# Altium PCB Main2.PcbDoc
Units mm, origin at the board's own origin, x right, y up, seen from the top; angles counter-clockwise.
Board outline 145.75 x 96.95 mm, 2 copper layers (Top Layer, Bottom Layer); 13 components, 21 nets, 214 pads, 0 vias.
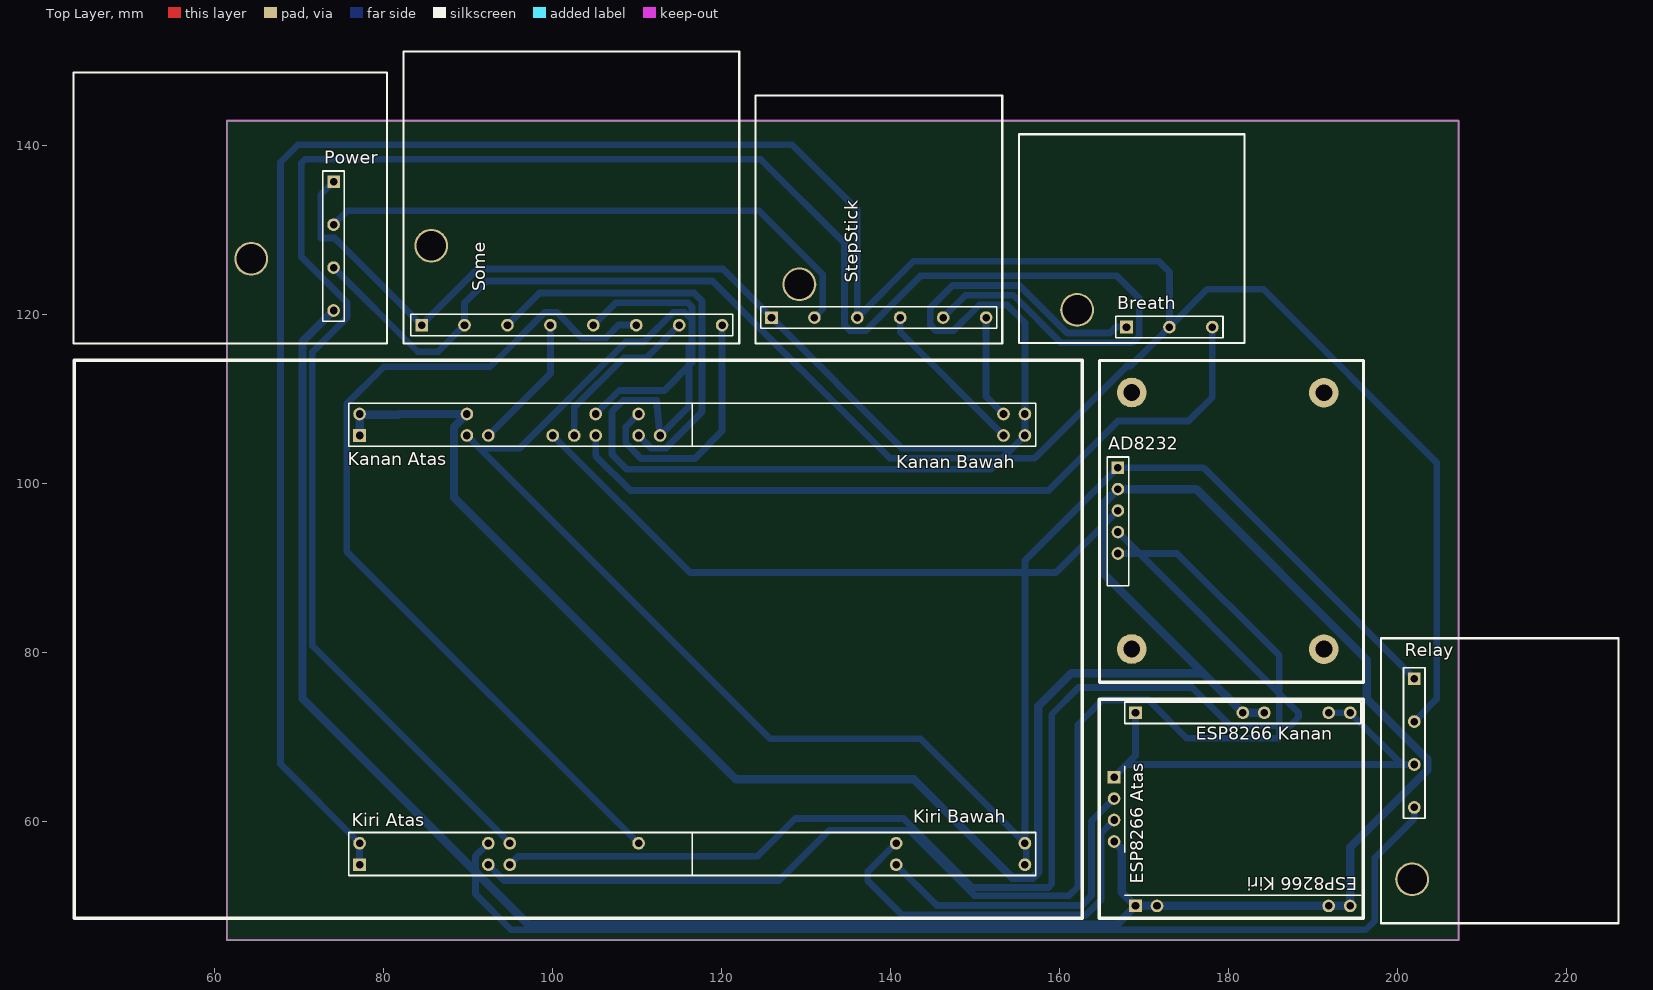
[diagram p0: Top Layer view]
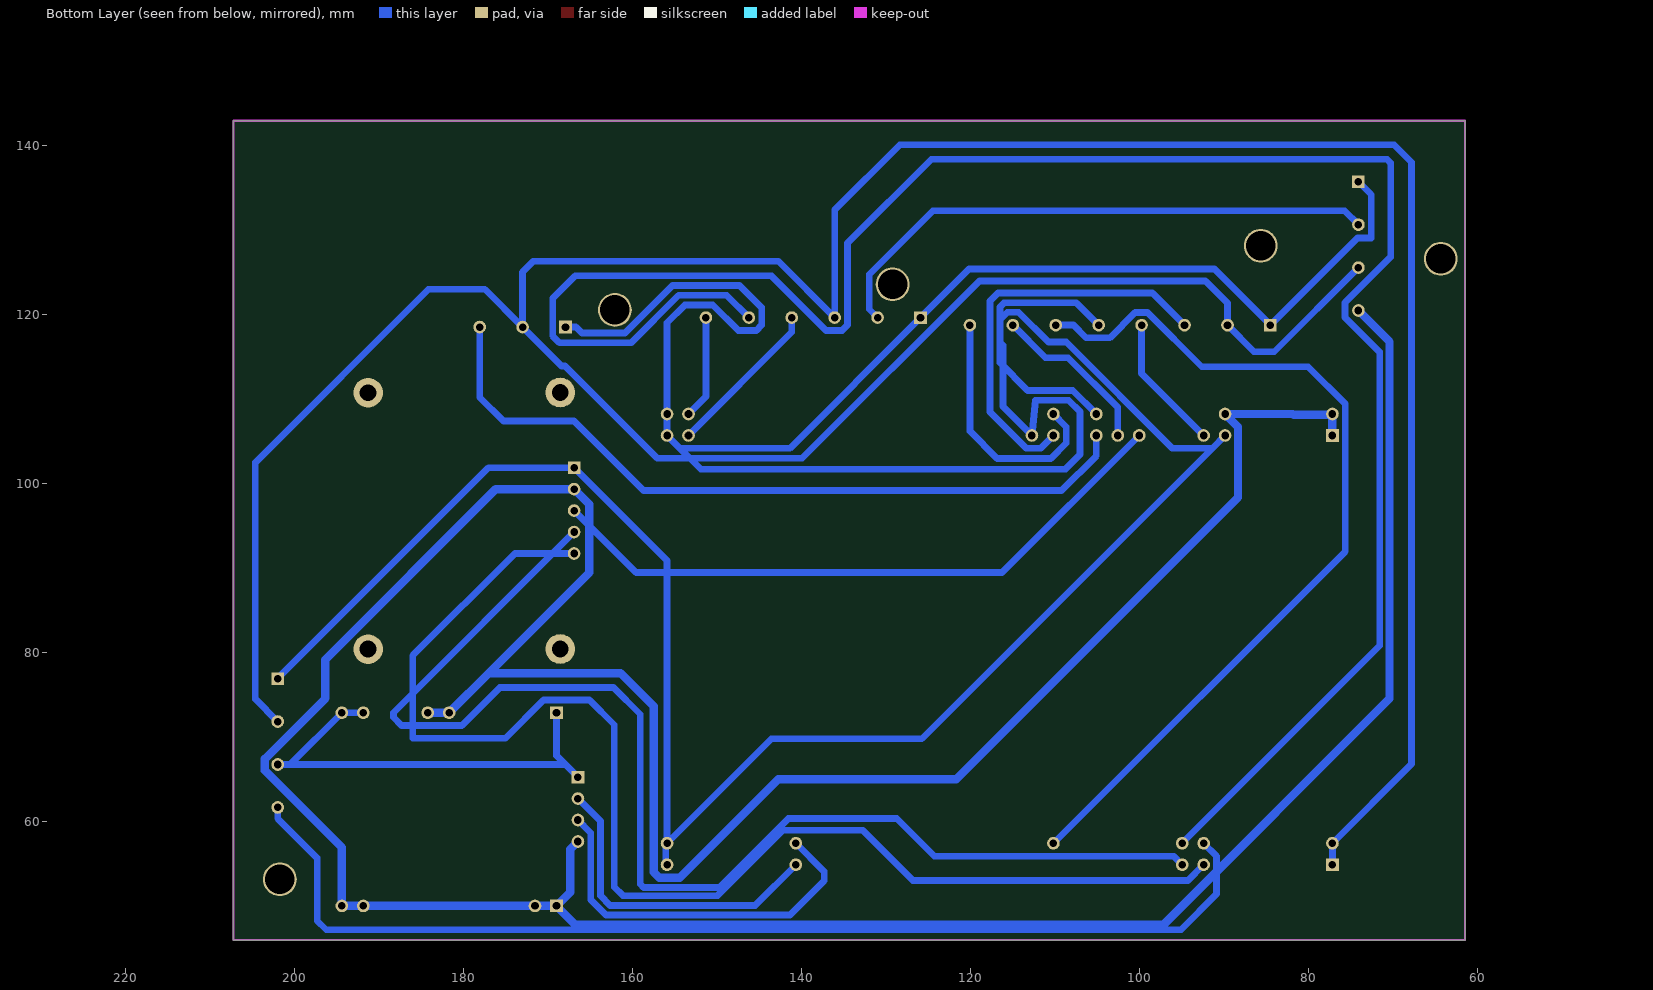
[diagram p1: Bottom Layer view, seen from below]

## Layer stack, top to bottom
Top Solder: solder mask 0.0102, Solder Resist, Dk 3.5
Top Layer: signal copper 0.0356
Dielectric 1: dielectric 0.32, FR-4, Dk 4.8
Bottom Layer: signal copper 0.0356
Bottom Solder: solder mask 0.0102, Solder Resist, Dk 3.5

## Board outline
61.468,45.974 61.468,142.926 207.213,142.926 207.213,45.974

## Design rules (kind name [scope] priority, off if disabled: settings)
Clearance [All] p1: gap=0.35
PolygonConnect [All] p1: connectstyle=Relief reliefconductorwidth=0.254 reliefentries=4 polygonreliefangle="90 Angle" airgapwidth=0.254
RoutingVias [All] p1: holewidth=0.711 width=1.27 viastyle="Through Hole" minholewidth=0.711 minwidth=1.27 maxholewidth=0.711 maxwidth=1.27
SolderMaskExpansion [All] p1: expansion=0.102
Width Width_1 [All] p1: maxlimit=0.8 minlimit=0.8 preferedwidth=0.8
30 further rules are at their usual default settings.

## Components (designator, comment, footprint, x,y, rotation, side; value= is the part's Value field where it differs from the comment)
AD8232 "" HDR1X6 166.903,101.879 r270 top
Breath "Header 5" HDR1X5 167.919,118.516 r0 top
"ESP8266 Atas" "" HDR1X4 166.451,65.258 r270 top
"ESP8266 Kanan" "" HDR1X11#1 168.991,72.878 r0 top
"ESP8266 Kiri" "" HDR1X11#2 168.991,50.018 r0 top
"Kanan Atas" "" HDR2X16#1 77.165,105.689 r0 top
"Kanan Bawah" "" HDR2X16#2 117.805,105.689 r0 top
"Kiri Atas" "" HDR2X16#3 77.165,54.889 r0 top
"Kiri Bawah" "" HDR2X16#4 117.805,54.889 r0 top
Power "Header 7" HDR1X7 74.092,135.712 r270 top
Relay "Header 7" HDR1X7 201.981,76.911 r270 top
Some "Header 15" HDR1X15 84.506,118.745 r0 top
StepStick "Header 11" HDR1X11#3 125.908,119.634 r0 top

## Footprints (in the part's own frame and the unit in brackets; to place one, negate y for a bottom-side part, rotate by r counter-clockwise, add the part's x,y. Pads: shape width x height; smd on the part's side, far side on the other; paste and mask are expansions set on the pad)
HDR1X4 [mm] "Connector; Header; 4 Position"
  rect 1.5x1.5 hole 0.9: 1(0,0)
  round 1.5 hole 0.9: 2(2.54,0) 3(5.08,0) 4(7.62,0)
  silkscreen extent -1.27,1.27 8.89,1.27
HDR1X5 [mm] "Connector; Header; 5 Position"
  rect 1.5x1.5 hole 0.9: 1(0,0)
  round 0 all layers, no hole: 2(2.54,0) 4(7.62,0)
  round 1.5 hole 0.9: 3(5.08,0) 5(10.16,0)
  silkscreen extent -1.27,-1.27 11.43,1.27
HDR1X6 [mm] "Connector; Header; 6 Position"
  rect 1.5x1.5 hole 0.9: 1(0,0)
  round 1.5 hole 0.9: 2(2.54,0) 3(5.08,0) 4(7.62,0) 5(10.16,0)
  round 0 all layers, no hole: 6(12.7,0)
  silkscreen extent -1.27,-1.27 13.97,1.27
HDR1X7 [mm] "Connector; Header; 7 Position"
  rect 1.5x1.5 hole 0.9: 1(0,0)
  round 0 all layers, no hole: 2(2.54,0) 4(7.62,0) 6(12.7,0)
  round 1.5 hole 0.9: 3(5.08,0) 5(10.16,0) 7(15.24,0)
  silkscreen extent -1.27,-1.27 16.51,1.27
HDR1X11#1 [mm] "Connector; Header; 11 Position"
  rect 1.5x1.5 hole 0.9: 1(0,0)
  round 0 all layers, no hole: 2(2.54,0) 3(5.08,0) 4(7.62,0) 5(10.16,0) 8(17.78,0) 9(20.32,0)
  round 1.5 hole 0.9: 6(12.7,0) 7(15.24,0) 10(22.86,0) 11(25.4,0)
  silkscreen extent -1.27,-1.27 26.67,1.27
HDR1X11#2 [mm] "Connector; Header; 11 Position"
  rect 1.5x1.5 hole 0.9: 1(0,0)
  round 1.5 hole 0.9: 2(2.54,0) 10(22.86,0) 11(25.4,0)
  round 0 all layers, no hole: 3(5.08,0) 4(7.62,0) 5(10.16,0) 6(12.7,0) 7(15.24,0) 8(17.78,0) 9(20.32,0)
  silkscreen extent -1.27,1.27 26.67,1.27
HDR1X11#3 [mm] "Connector; Header; 11 Position"
  rect 1.5x1.5 hole 0.9: 1(0,0)
  round 0 all layers, no hole: 2(2.54,0) 4(7.62,0) 6(12.7,0) 8(17.78,0) 10(22.86,0)
  round 1.5 hole 0.9: 3(5.08,0) 5(10.16,0) 7(15.24,0) 9(20.32,0) 11(25.4,0)
  silkscreen extent -1.27,-1.27 26.67,1.27
HDR1X15 [mm] "Connector; Header; 15 Position"
  rect 1.5x1.5 hole 0.9: 1(0,0)
  round 0 all layers, no hole: 2(2.54,0) 4(7.62,0) 6(12.7,0) 8(17.78,0) 10(22.86,0) 12(27.94,0) 14(33.02,0)
  round 1.5 hole 0.9: 3(5.08,0) 5(10.16,0) 7(15.24,0) 9(20.32,0) 11(25.4,0) 13(30.48,0) 15(35.56,0)
  silkscreen extent -1.27,-1.27 36.83,1.27
HDR2X16#1 [mm] "Connector; Header; 16x2 Position"
  rect 1.5x1.5 hole 0.9: 1(0,0)
  round 1.5 hole 0.9: 2(0,2.54) 11(12.7,0) 12(12.7,2.54) 13(15.24,0) 19(22.86,0) 21(25.4,0) 23(27.94,0) 24(27.94,2.54) 27(33.02,0) 28(33.02,2.54) 29(35.56,0)
  round 0 all layers, no hole: 3(2.54,0) 4(2.54,2.54) 5(5.08,0) 6(5.08,2.54) 7(7.62,0) 8(7.62,2.54) 9(10.16,0) 10(10.16,2.54) 14(15.24,2.54) 15(17.78,0) 16(17.78,2.54) 17(20.32,0) 18(20.32,2.54) 20(22.86,2.54) 22(25.4,2.54) 25(30.48,0) 26(30.48,2.54) 30(35.56,2.54) 31(38.1,0) 32(38.1,2.54)
  silkscreen extent -1.27,-1.27 39.37,3.81
HDR2X16#2 [mm] "Connector; Header; 16x2 Position"
  rect 0x0 all layers, no hole: 1(0,0)
  round 0 all layers, no hole: 2(0,2.54) 3(2.54,0) 4(2.54,2.54) 5(5.08,0) 6(5.08,2.54) 7(7.62,0) 8(7.62,2.54) 9(10.16,0) 10(10.16,2.54) 11(12.7,0) 12(12.7,2.54) 13(15.24,0) 14(15.24,2.54) 15(17.78,0) 16(17.78,2.54) 17(20.32,0) 18(20.32,2.54) 19(22.86,0) 20(22.86,2.54) 21(25.4,0) 22(25.4,2.54) 23(27.94,0) 24(27.94,2.54) 25(30.48,0) 26(30.48,2.54) 27(33.02,0) 28(33.02,2.54)
  round 1.5 hole 0.9: 29(35.56,0) 30(35.56,2.54) 31(38.1,0) 32(38.1,2.54)
  silkscreen extent -1.27,-1.27 39.37,3.81
HDR2X16#3 [mm] "Connector; Header; 16x2 Position"
  rect 1.5x1.5 hole 0.9: 1(0,0)
  round 1.5 hole 0.9: 2(0,2.54) 13(15.24,0) 14(15.24,2.54) 15(17.78,0) 16(17.78,2.54) 28(33.02,2.54)
  round 0 all layers, no hole: 3(2.54,0) 4(2.54,2.54) 5(5.08,0) 6(5.08,2.54) 7(7.62,0) 8(7.62,2.54) 9(10.16,0) 10(10.16,2.54) 11(12.7,0) 12(12.7,2.54) 17(20.32,0) 18(20.32,2.54) 19(22.86,0) 20(22.86,2.54) 21(25.4,0) 22(25.4,2.54) 23(27.94,0) 24(27.94,2.54) 25(30.48,0) 26(30.48,2.54) 27(33.02,0) 29(35.56,0) 30(35.56,2.54) 31(38.1,0) 32(38.1,2.54)
  silkscreen extent -1.27,-1.27 39.37,3.81
HDR2X16#4 [mm] "Connector; Header; 16x2 Position"
  rect 0x0 all layers, no hole: 1(0,0)
  round 0 all layers, no hole: 2(0,2.54) 3(2.54,0) 4(2.54,2.54) 5(5.08,0) 6(5.08,2.54) 7(7.62,0) 8(7.62,2.54) 9(10.16,0) 10(10.16,2.54) 11(12.7,0) 12(12.7,2.54) 13(15.24,0) 14(15.24,2.54) 15(17.78,0) 16(17.78,2.54) 17(20.32,0) 18(20.32,2.54) 21(25.4,0) 22(25.4,2.54) 23(27.94,0) 24(27.94,2.54) 25(30.48,0) 26(30.48,2.54) 27(33.02,0) 28(33.02,2.54) 29(35.56,0) 30(35.56,2.54)
  round 1.5 hole 0.9: 19(22.86,0) 20(22.86,2.54) 31(38.1,0) 32(38.1,2.54)
  silkscreen extent -1.27,-1.27 39.37,3.81

## Part data
AD8232: library part "Header 6", "Header, 6-Pin"
Breath: "Header, 5-Pin"
"ESP8266 Atas": library part "Header 4", "Header, 4-Pin"
"ESP8266 Kanan" "ESP8266 Kiri": library part "Header 11", "Header, 11-Pin"
"Kanan Atas" "Kanan Bawah" "Kiri Atas" "Kiri Bawah": library part "Header 16X2", "Header, 16-Pin, Dual row"
Power Relay: "Header, 7-Pin"
Some: "Header, 15-Pin"
StepStick: "Header, 11-Pin"

## Free pads (board coordinates)
  round 3.5 hole 2: 6(191.278,80.395) 7(168.545,80.42) 8(168.545,110.773) 9(191.278,110.748)
  round 4 hole 3.5: 8(64.338,126.594) 8(162.077,120.548) 10(85.649,128.143) 10(129.21,123.571) 10(201.727,53.162)

## Nets (pads, with @x,y where several pads share a name; then routed paths per layer and width w, separated by ;. In a path a pad name is that pad's centre, name@x,y a point inside that pad or via, vN(x,y) a via of type N, cw(c..) or ccw(c..) an arc to the next point about the centre after c; other vN are vias at no path point)
+3.3: "ESP8266 Atas.4" "ESP8266 Kanan.6" "ESP8266 Kanan.7" "ESP8266 Kiri.1" "ESP8266 Kiri.2" "ESP8266 Kiri.10" "ESP8266 Kiri.11" "Kanan Atas.1" "Kanan Atas.2" "Kanan Atas.12" AD8232.2 Power.7 | length 457.1
  Bottom Layer w1: Power.7 70.409,116.789 70.409,74.549 97.18,47.777 166.751,47.777 168.991,50.018 ; 77.165,105.689 77.165,108.229 77.268,108.127 81.751,108.127 81.853,108.229 89.865,108.229 88.341,106.705 88.341,98.349 121.666,65.024 142.723,65.024 154.381,53.365 156.845,53.365 157.505,54.026 157.505,73.66 161.417,77.572 176.997,77.572 ; 166.451,57.638 167.386,56.702 167.386,51.622 168.991,50.018 ; 184.231,72.878 181.691,72.878 176.997,77.572 ; 168.991,50.018 171.531,50.018 174.777,50.018 174.798,50.038 190.348,50.038 190.368,50.018 191.851,50.018 194.391,50.018 194.391,56.926 203.505,66.04 203.505,67.412 196.342,74.574 196.342,79.172 176.174,99.339 AD8232.2 165.1,97.536 165.1,89.468 176.997,77.572
+5: "Kiri Atas.1" "Kiri Atas.2" Breath.3 Power.5 Relay.3 Some.3 StepStick.5 | length 415.7
  Bottom Layer w0.8: Power.5 84.049,115.595 86.436,115.595 Some.3 89.586,121.361 92.202,123.977 118.923,123.977 139.903,102.997 157.074,102.997 167.996,113.919 168.402,113.919 Breath.3 ; 77.165,54.889 77.165,57.429 67.793,66.802 67.793,138.024 69.85,140.081 128.372,140.081 136.068,132.385 StepStick.5 142.748,126.314 171.697,126.314 172.999,125.012 Breath.3 ; Relay.3 204.631,74.481 204.631,102.5 184.143,122.987 177.47,122.987 Breath.3
+7.4: Power.3 StepStick.3 | length 67.2
  Bottom Layer w0.8: Power.3 75.743,132.283 124.422,132.283 131.978,124.726 131.978,120.625 StepStick.3
GND: "Kanan Atas.11" "Kanan Atas.29" "Kanan Bawah.31" "Kanan Bawah.32" "Kiri Bawah.31" "Kiri Bawah.32" AD8232.1 Breath.1 Power.1 Relay.1 Some.1 StepStick.1 | length 457.7
  Bottom Layer w0.8: Power.1 72.568,134.188 72.568,129.057 74.193,129.057 Some.1 91.135,125.374 120.167,125.374 StepStick.1 141.376,104.165 154.381,104.165 ; 89.865,105.689 91.389,104.165 ; 155.905,54.889 156.052,55.037 156.052,57.282 155.905,57.429 ; Breath.1 166.7,118.516 165.982,117.798 160.89,117.798 155.255,123.434 147.32,123.434 144.704,120.818 144.704,118.745 145.339,118.11 147.471,118.11 150.495,121.134 153.797,121.134 155.905,119.026 155.905,108.229 155.905,105.689 154.381,104.165 ; Relay.1 177.013,101.879 AD8232.1 155.905,90.881 155.905,57.429 ; 91.389,104.165 125.755,69.799 143.535,69.799 155.905,57.429 ; 91.389,104.165 96.087,104.165 108.66,116.738 110.769,116.738 114.3,120.269 115.621,120.269 116.51,119.38 116.51,116.713 116.154,116.357 116.154,109.118 112.725,105.689 112.293,109.855 108.382,109.855 107.036,108.509 107.036,103.428 108.762,101.702 151.917,101.702 154.381,104.165
NetAD8232_3: "Kanan Atas.19" AD8232.3 | length 76.6
  Bottom Layer w0.8: 100.025,105.689 116.256,89.459 159.563,89.459 AD8232.3
NetAD8232_4: "Kiri Atas.15" AD8232.4 | length 153.6
  Bottom Layer w0.8: 94.945,54.889 95.961,55.905 124.282,55.905 128.727,60.35 141.554,60.35 149.708,52.197 158.674,52.197 159.08,52.603 159.08,72.695 162.255,75.87 175.692,75.87 180.188,71.374 187.325,71.374 188.29,72.339 188.29,72.873 AD8232.4
NetAD8232_5: "Kiri Atas.13" AD8232.5 | length 156.7
  Bottom Layer w0.8: 92.405,54.889 94.259,53.035 126.822,53.035 132.766,58.979 142.189,58.979 149.941,51.227 161.133,51.227 162.154,52.248 162.154,71.45 165.1,74.397 170.51,74.397 175.057,69.85 186.004,69.85 186.004,79.629 173.914,91.719 AD8232.5
NetBreath_5: "Kanan Atas.23" Breath.5 | length 90
  Bottom Layer w0.8: 105.105,105.689 105.105,103.276 109.22,99.162 158.688,99.162 166.917,107.391 175.26,107.391 178.079,110.211 Breath.5
"NetESP8266 Atas_1": "ESP8266 Atas.1" "ESP8266 Kanan.1" "ESP8266 Kanan.10" "ESP8266 Kanan.11" Relay.5 | length 53.9
  Bottom Layer w0.8: 166.451,65.258 167.944,66.751 ; 168.991,72.878 168.991,67.798 167.944,66.751 ; 191.851,72.878 194.391,72.878 200.517,66.751 ; Relay.5 200.517,66.751 ; 167.944,66.751 200.517,66.751
"NetESP8266 Atas_2": "ESP8266 Atas.2" "Kiri Bawah.19" | length 38.2
  Bottom Layer w0.8: 140.665,54.889 145.477,50.077 162.643,50.077 163.792,51.226 163.792,60.059 166.451,62.718
"NetESP8266 Atas_3": "ESP8266 Atas.3" "Kiri Bawah.20" | length 46
  Bottom Layer w0.8: 140.665,57.429 137.312,54.077 137.312,52.984 141.369,48.927 163.126,48.927 164.948,50.749 164.948,58.674 166.451,60.178
"NetKanan Atas_13": "Kanan Atas.13" Some.7 | length 16.1
  Bottom Layer w0.8: 92.405,105.689 99.746,113.03 Some.7
"NetKanan Atas_21": "Kanan Atas.21" Some.13 | length 19.8
  Bottom Layer w0.8: 102.565,105.689 102.565,109.017 108.433,114.884 111.125,114.884 Some.13
"NetKanan Atas_24": "Kanan Atas.24" Some.9 | length 33.5
  Bottom Layer w0.8: Some.9 107.467,121.387 116.027,121.387 116.51,120.904 116.51,114.3 113.233,111.023 107.899,111.023 105.105,108.229
"NetKanan Atas_27": "Kanan Atas.27" Some.5 | length 48
  Bottom Layer w0.8: Some.5 98.476,122.555 116.738,122.555 117.678,121.615 117.678,108.458 113.386,104.165 111.709,104.165 110.185,105.689
"NetKanan Atas_28": "Kanan Atas.28" Some.15 | length 30.1
  Bottom Layer w0.8: 110.185,108.229 108.661,106.705 108.661,104.8 110.49,102.972 116.84,102.972 120.066,106.197 Some.15
"NetKanan Bawah_29": "Kanan Bawah.29" StepStick.7 | length 19
  Bottom Layer w0.8: StepStick.7 141.148,117.907 153.365,105.689
"NetKanan Bawah_30": "Kanan Bawah.30" StepStick.11 | length 12.3
  Bottom Layer w0.8: StepStick.11 151.308,110.287 153.365,108.229
"NetKiri Atas_14": "Kiri Atas.14" Relay.7 | length 130.6
  Bottom Layer w0.8: 92.405,57.429 90.881,55.905 90.881,51.41 95.098,47.193 196.24,47.193 197.307,48.26 197.307,55.702 201.981,60.376 Relay.7
"NetKiri Atas_16": "Kiri Atas.16" StepStick.9 | length 242.8
  Bottom Layer w0.8: 94.945,57.429 71.572,80.802 71.572,115.553 75.672,119.653 75.672,121.4 70.268,126.804 70.268,137.952 70.678,138.362 124.637,138.362 134.544,128.455 134.544,118.745 135.179,118.11 137.084,118.11 143.558,124.584 166.779,124.584 169.443,121.92 169.443,117.475 168.617,116.648 160.168,116.648 154.533,122.284 148.878,122.284 StepStick.9
"NetKiri Atas_28": "Kiri Atas.28" Some.11 | length 106.9
  Bottom Layer w0.8: Some.11 107.796,118.745 106.296,117.245 103.506,117.245 100.506,120.245 99.06,120.245 92.632,113.817 80.061,113.817 75.641,109.398 75.641,91.973 110.185,57.429
pads on no net: "ESP8266 Kanan.2" "ESP8266 Kanan.3" "ESP8266 Kanan.4" "ESP8266 Kanan.5" "ESP8266 Kanan.8" "ESP8266 Kanan.9" "ESP8266 Kiri.3" "ESP8266 Kiri.4" "ESP8266 Kiri.5" "ESP8266 Kiri.6" "ESP8266 Kiri.7" "ESP8266 Kiri.8" "ESP8266 Kiri.9" "Kanan Atas.3" "Kanan Atas.4" "Kanan Atas.5" "Kanan Atas.6" "Kanan Atas.7" "Kanan Atas.8" "Kanan Atas.9" "Kanan Atas.10" "Kanan Atas.14" "Kanan Atas.15" "Kanan Atas.16" "Kanan Atas.17" "Kanan Atas.18" "Kanan Atas.20" "Kanan Atas.22" "Kanan Atas.25" "Kanan Atas.26" "Kanan Atas.30" "Kanan Atas.31" "Kanan Atas.32" "Kanan Bawah.1" "Kanan Bawah.2" "Kanan Bawah.3" "Kanan Bawah.4" "Kanan Bawah.5" "Kanan Bawah.6" "Kanan Bawah.7" "Kanan Bawah.8" "Kanan Bawah.9" "Kanan Bawah.10" "Kanan Bawah.11" "Kanan Bawah.12" "Kanan Bawah.13" "Kanan Bawah.14" "Kanan Bawah.15" "Kanan Bawah.16" "Kanan Bawah.17" "Kanan Bawah.18" "Kanan Bawah.19" "Kanan Bawah.20" "Kanan Bawah.21" "Kanan Bawah.22" "Kanan Bawah.23" "Kanan Bawah.24" "Kanan Bawah.25" "Kanan Bawah.26" "Kanan Bawah.27" "Kanan Bawah.28" "Kiri Atas.3" "Kiri Atas.4" "Kiri Atas.5" "Kiri Atas.6" "Kiri Atas.7" "Kiri Atas.8" "Kiri Atas.9" "Kiri Atas.10" "Kiri Atas.11" "Kiri Atas.12" "Kiri Atas.17" "Kiri Atas.18" "Kiri Atas.19" "Kiri Atas.20" "Kiri Atas.21" "Kiri Atas.22" "Kiri Atas.23" "Kiri Atas.24" "Kiri Atas.25" "Kiri Atas.26" "Kiri Atas.27" "Kiri Atas.29" "Kiri Atas.30" "Kiri Atas.31" "Kiri Atas.32" "Kiri Bawah.1" "Kiri Bawah.2" "Kiri Bawah.3" "Kiri Bawah.4" "Kiri Bawah.5" "Kiri Bawah.6" "Kiri Bawah.7" "Kiri Bawah.8" "Kiri Bawah.9" "Kiri Bawah.10" "Kiri Bawah.11" "Kiri Bawah.12" "Kiri Bawah.13" "Kiri Bawah.14" "Kiri Bawah.15" "Kiri Bawah.16" "Kiri Bawah.17" "Kiri Bawah.18" "Kiri Bawah.21" "Kiri Bawah.22" "Kiri Bawah.23" "Kiri Bawah.24" "Kiri Bawah.25" "Kiri Bawah.26" "Kiri Bawah.27" "Kiri Bawah.28" "Kiri Bawah.29" "Kiri Bawah.30" AD8232.6 Breath.2 Breath.4 Power.2 Power.4 Power.6 Relay.2 Relay.4 Relay.6 Some.2 Some.4 Some.6 Some.8 Some.10 Some.12 Some.14 StepStick.2 StepStick.4 StepStick.6 StepStick.8 StepStick.10

## Keep-outs
Keep-Out Layer:
  the board outline again, w0.254

## Silkscreen, mask and mechanical layers (free items; w line width, h text height)
Top Overlay:
  lines w0.254: 43.307,116.586 43.307,148.641 80.416,148.641 80.416,116.586 43.307,116.586 ; 82.347,116.586 122.098,116.586 122.098,151.13 82.347,151.13 82.347,116.586 ; 124.003,116.586 153.213,116.586 153.213,145.923 124.003,145.923 124.003,116.586 ; 155.219,116.611 155.219,141.337 181.889,141.337 181.889,116.611 155.219,116.611 ; 198.044,47.955 226.15,47.955 226.15,81.686 198.044,81.686 198.044,47.955
  lines w0.4: 43.387,48.539 43.387,114.579 162.687,114.579 162.687,48.539 43.387,48.539 ; 164.719,48.539 195.961,48.539 195.961,74.473 164.719,74.473 164.719,48.539 ; 164.728,76.461 195.97,76.461 195.97,114.561 164.728,114.561 164.728,76.461